# Altium PCB TouchPanel.PcbDoc
Units mil, origin at the board's own origin, x right, y up, seen from the top; angles counter-clockwise.
Board outline 2650 x 2300 mil, 2 copper layers (Top Layer, Bottom Layer); 29 components, 23 nets, 145 pads, 13 vias.
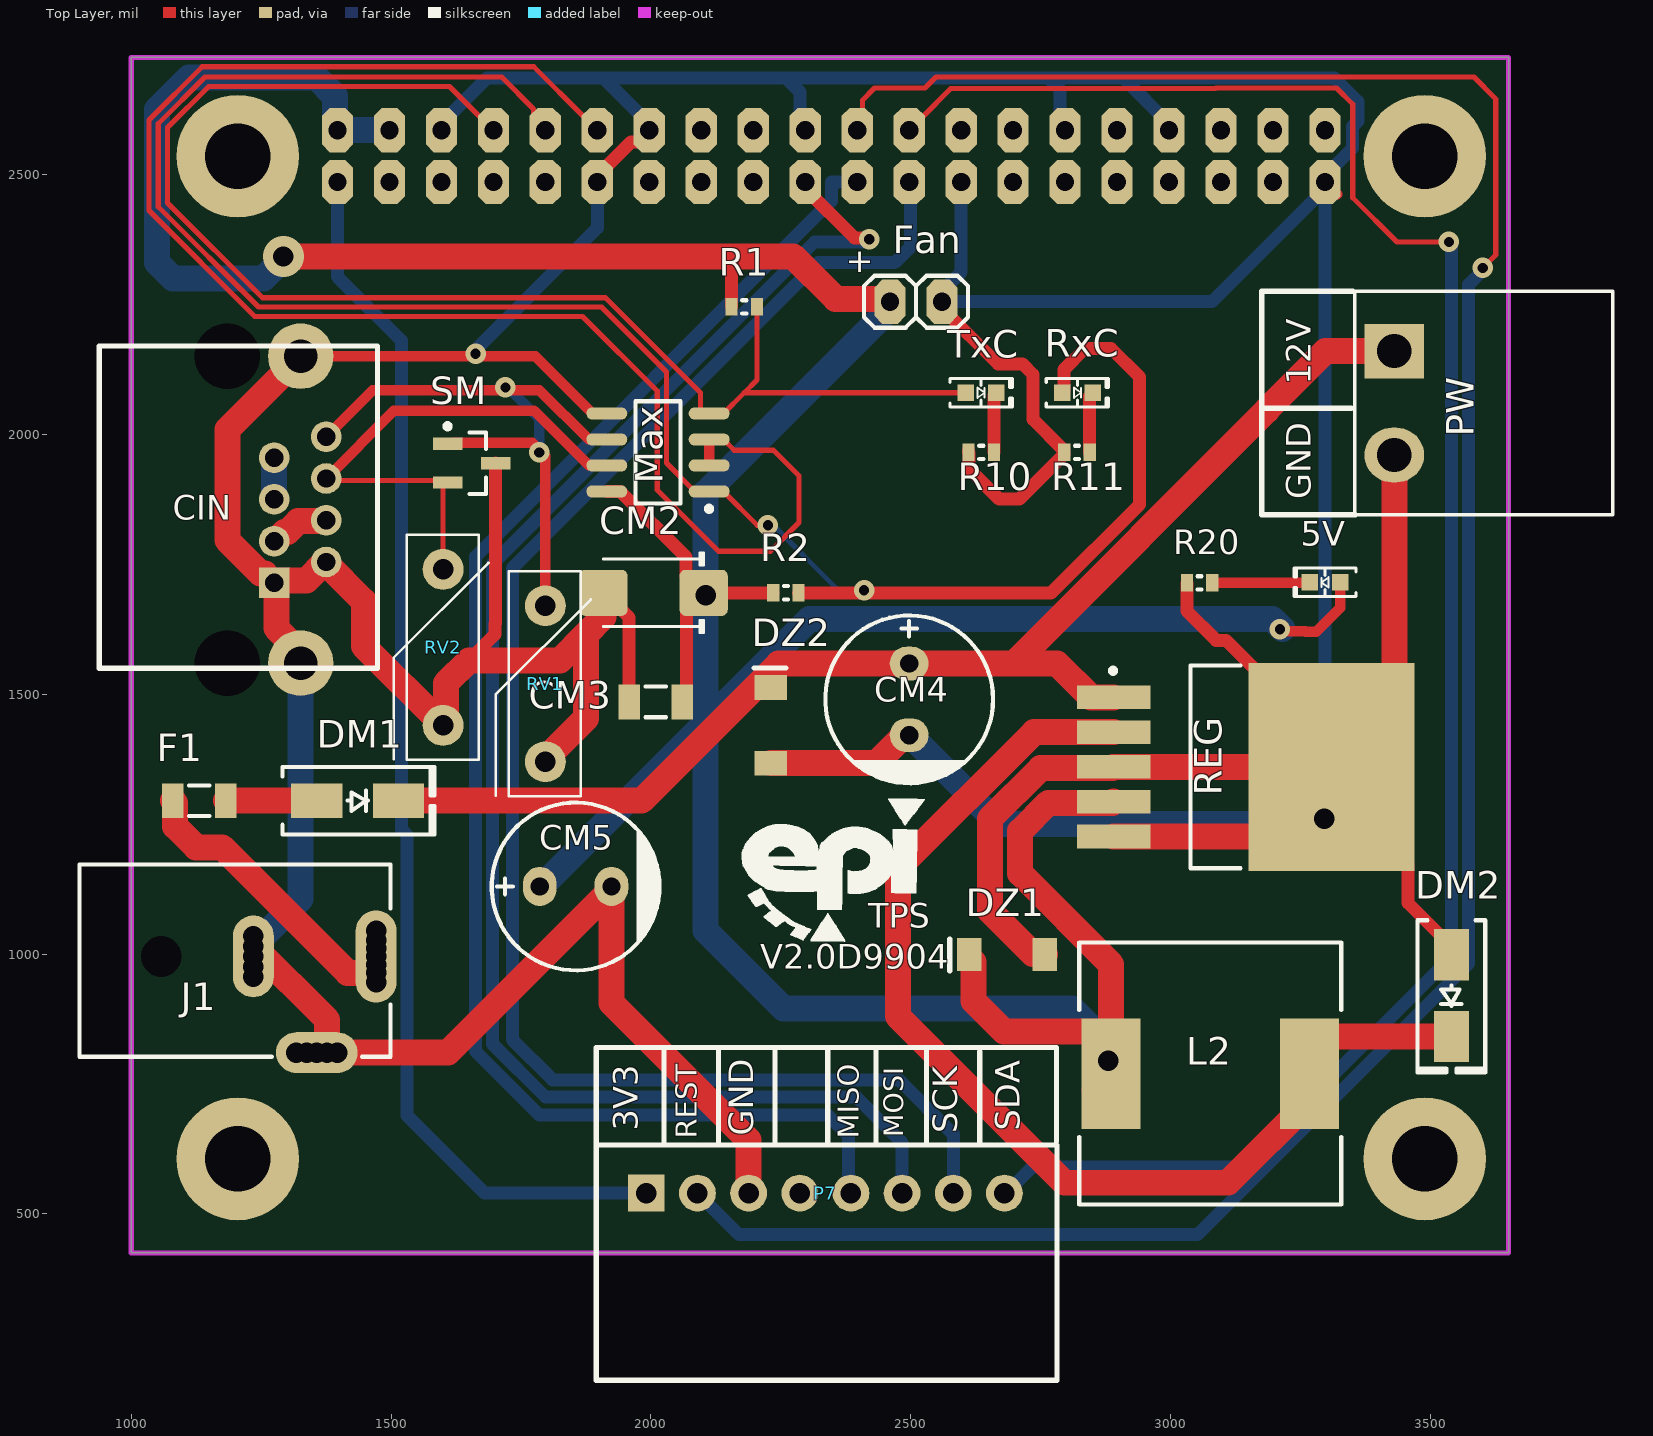
[diagram p0: Top Layer view]
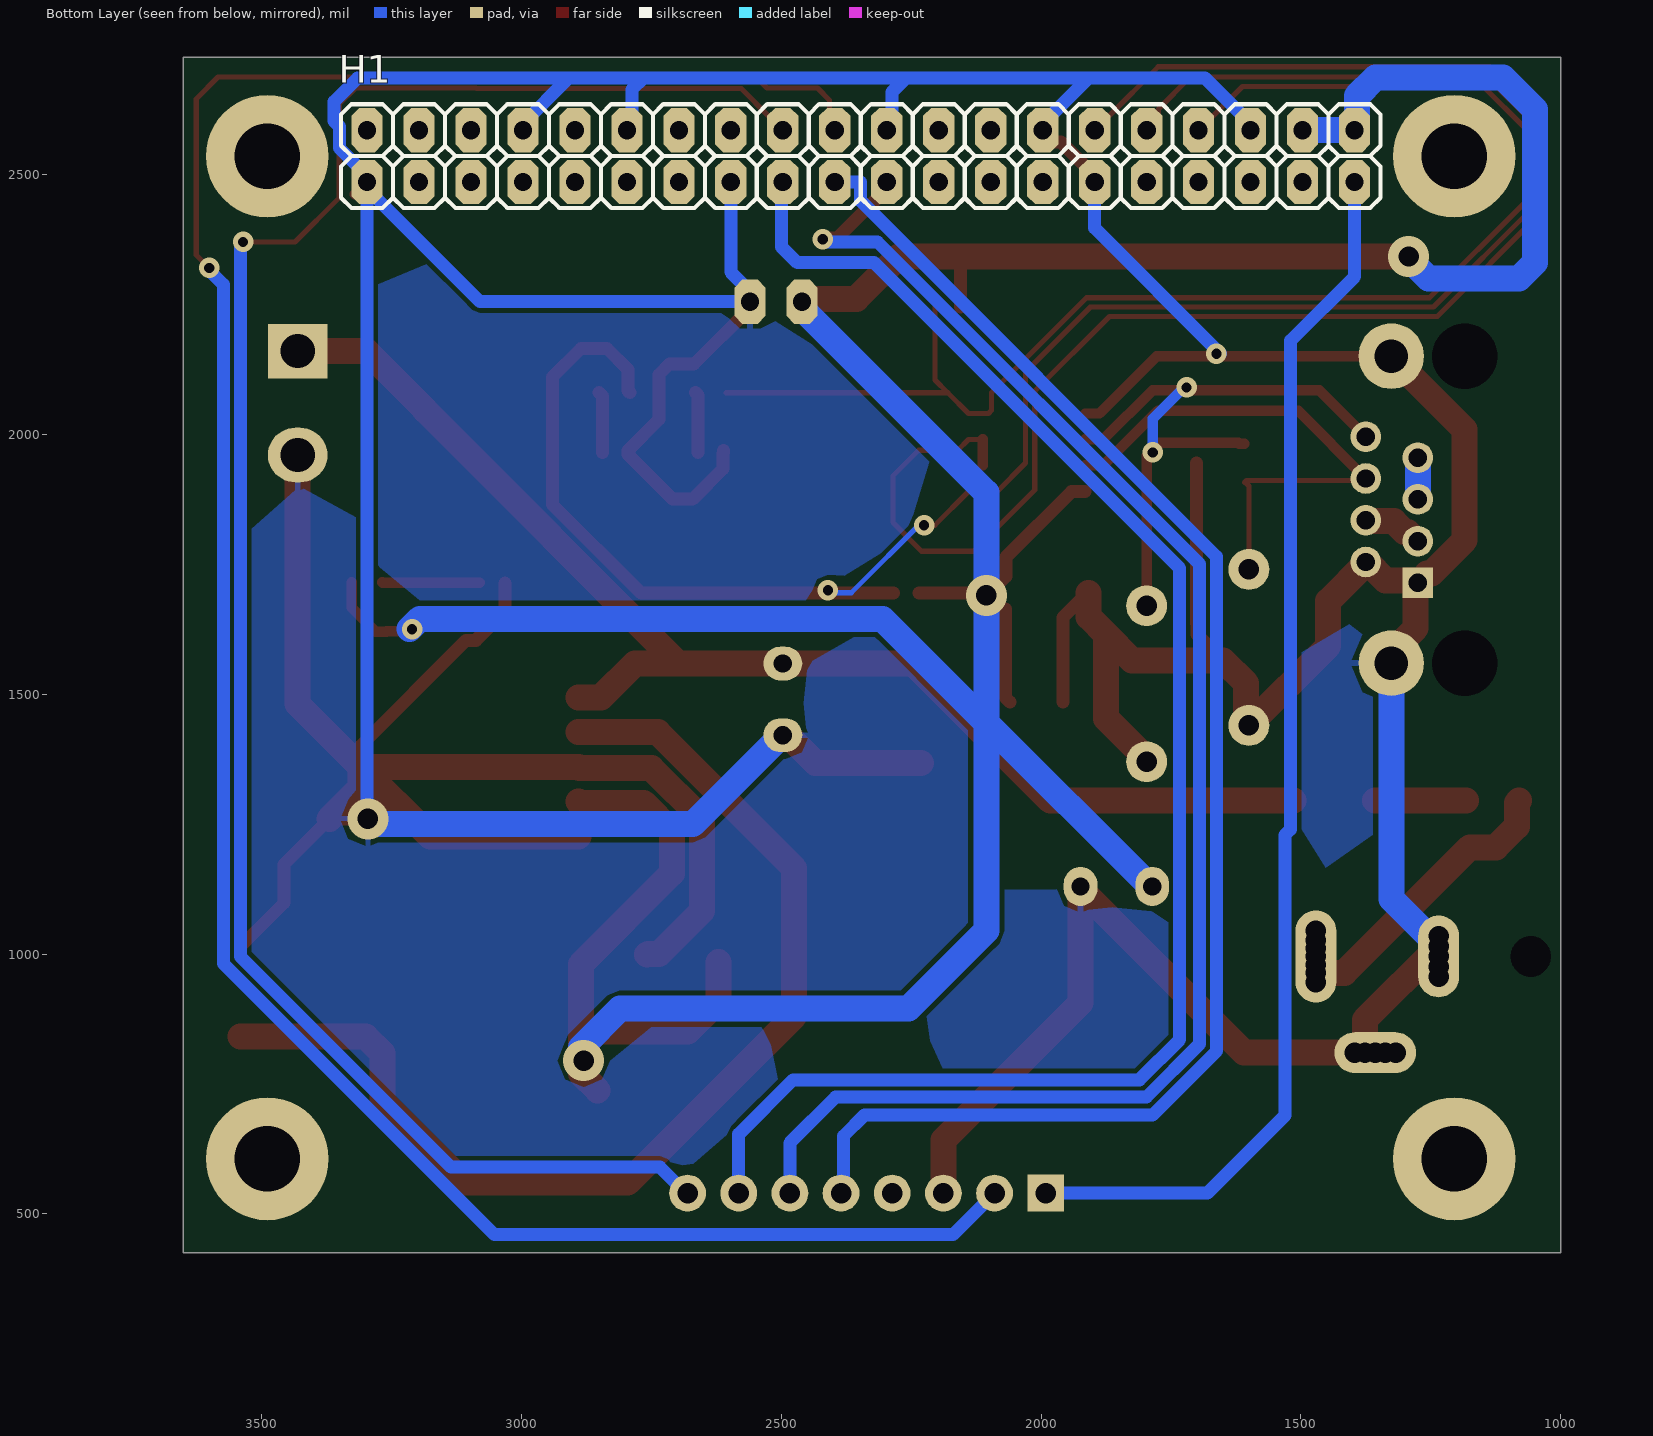
[diagram p1: Bottom Layer view, seen from below]

## Layer stack, top to bottom
Top Solder: solder mask 0.4, Solder Resist, Dk 3.5
Top Layer: signal copper 1.4
Dielectric 1: dielectric 12.6, FR-4, Dk 4.8
Bottom Layer: signal copper 1.4
Bottom Solder: solder mask 0.4, Solder Resist, Dk 3.5

## Board outline
1000,425 1000,2725 3650,2725 3650,425

## Design rules (kind name [scope] priority, off if disabled: settings)
Clearance [All] p1: gap=7.87 ignorepadtopadclearanceinfootprint=FALSE except(0: Arc-Hole Track-Hole SMDPad-Hole THPad-Hole Via-Hole Fill-Hole Poly-Hole Region-Hole Text-Hole)
PolygonConnect [All] p1: connectstyle=Relief reliefconductorwidth=10 reliefentries=4 polygonreliefangle="90 Angle" airgapwidth=10
RoomDefinition TouchPanel [InComponentClass('TouchPanel')] p1: confinementstyle=ConfineOut formatcopy=TRUE lockcomponents=FALSE outline 4480,520 4700,520 4700,2640 4480,2640
RoutingVias [All] p1: holewidth=28 width=50 viastyle="Through Hole" minholewidth=28 minwidth=50 maxholewidth=28 maxwidth=50
SolderMaskExpansion [All] p1: expansion=4
Width [All] p1: maxlimit=100 minlimit=10 preferedwidth=50 minimp=50.000000 maximp=50.000000 favimp=50.000000
30 further rules are at their usual default settings.

## Components (designator, comment, footprint, x,y, rotation, side; value= is the part's Value field where it differs from the comment)
5V "RED" "LED 0603/1608 RED" 3296.73,1715 r180 top
CIN "CN_MODJACK_8P" "CN_RJ45_TYCO_ DY122-8P8C-G" 1184.45,2150.28 r270 top
CM2 "10uF" CAPMP6032X280N 2005,1695 r180 top
CM3 "100nF" SMD_CAP_1206 2060,1485 r180 top
CM4 "100uF" "cap 03" 2496.73,1490 r90 top
CM5 "1000uF" "cap 03" 1855,1130 r180 top
DM1 "1N5822" "DO214AC SMA" 1435.79,1295 r0 top
DM2 "1N5822" "DO214AC SMA" 3540,920 r270 top
DZ1 "DZ5.6V 0.5W" Minimelf 2685,998.74 r180 top
DZ2 "DZ13V 0.5W" Minimelf 2230,1440 r90 top
F1 "Fuse 4A 1206" "Fuse SMD 1206" 1135,1290 r0 top
Fan "Header 2" "Male 2X1" 2460,2255 r0 top
H1 "20*2" "FEMALE 20x2" 1396.73,2585 r0 bottom locked
J1 "Power Jack" "Power Jack" 900.35,995.32 r0 top
L2 "Inductor" "BOURNS SRR1280" 3075.94,770 r180 top value=100uH2A
Max "MAX485ESA" SO8_NARROW_N 2013.43,1965 r180 top
P7 "XH8PF" CN_JST-B8B-S_XH 1991.02,540 r180 top
PW "Header 2" "phonix 2pin right 5.08" 3430,2060 r0 top
R1 "10k" "RES 0603 (1608X06L)" 2203.99,2245 r180 top
R2 "10k" "RES 0603 (1608X06L)" 2283.99,1695 r180 top
R10 "510" "RES 0603 (1608X06L)" 2611.01,1965 r0 top
R11 "510" "RES 0603 (1608X06L)" 2795,1965 r0 top
R20 "1K" "RES 0603 (1608X06L)" 3031.01,1714.06 r0 top
REG "LM2576-5V" TO-263-5 3143.94,1360 r0 top
RV1 "Res Varistor 10D201K" "Varistor Short Hieght - Vertical" 1796.73,1520 r270 top
RV2 "Res Varistor 10D201K" "Varistor Short Hieght - Vertical" 1600,1590 r270 top
RxC "RED" "LED 0603/1608 RED" 2820.47,2080 r0 top
SM "SM712 Diode" SOT23_BEC_M 1655,1944.43 r0 top
TxC "RED" "LED 0603/1608 RED" 2635,2080 r0 top

## Footprints (in the part's own frame and the unit in brackets; to place one, negate y for a bottom-side part, rotate by r counter-clockwise, add the part's x,y. Pads: shape width x height; smd on the part's side, far side on the other; paste and mask are expansions set on the pad)
"BOURNS SRR1280" [mm] "Precision Wire Wound Inductor, 2-Leads, Body 12.50x12.50mm, IPC Medium Density"
  rect 2.9x5.4 smd: 1(-4.85,0) 2(4.85,0)
  silkscreen extent -6.4,-6.4 6.4,6.4, body extent -6.25,-6.25 6.25,6.25, height 7.9
"cap 03" [mil]
  oval 65x75 hole 35: 1(68.9,0) 2(-68.9,0)
  silkscreen extent -161,-161 161,161, body extent -159,-159 157,158, height 473
CAPMP6032X280N [mm] "Capacitor, polarized, Molded Body, EIA 535BAAC size C; 6.00mm L X 3.20mm W X 2.80mm H"
  round 0.508 on Mech15: 0(0,0)
  rrect25% 2.35x2.25 smd: 1(-2.45,0) 2(2.45,0)
  silkscreen extent -2.45,-1.95 2.45,1.95, body extent -3.87,-2.02 3.73,1.93, height 3.1
CN_JST-B8B-S_XH [mm] "JST 2.5mm disconnectable crimp connector"
  rect 1.8x1.8 hole 1: 1(0,0)
  round 1.8 hole 1: 2(-2.5,0) 3(-5,0) 4(-7.5,0) 4(-7.5,0) 5(-10,0) 6(-12.5,0) 7(-15,0) 8(-17.5,0)
  silkscreen extent -20.07,-2.35 2.45,9.14, body extent -20.07,-2.35 2.45,9.2, height 6.1
"CN_RJ45_TYCO_ DY122-8P8C-G" [mm] "DY122-8P8C-G javan"
  rect 1.5x1.5 hole 0.9: 1(11.08,2.3)
  round 1.5 hole 0.9: 2(10.06,4.84) 3(9.04,2.3) 4(8.02,4.84) 5(7,2.3) 6(5.98,4.84) 7(4.96,2.3) 8(3.94,4.84)
  round 3.2 hole 1.63: 9(0,3.6) 9(15,3.6)
  round 0 hole 3.2: " "(0,0) " "(15,0)
  silkscreen extent -0.5,-6.25 15.25,7.35, body extent -1.75,-8.5 16.89,7.25, height 14.6
"DO214AC SMA" [mm]
  rect 2.5x1.7 smd: 1(-2,0) 2(2,0)
  silkscreen extent -3.68,-1.65 3.75,1.65, body extent -2.6,-1.37 2.6,1.37, height 2.4
"FEMALE 20x2" [mil]
  oct 60x85 hole 35: 1(0,0) 2(100,0) 3(200,0) 4(300,0) 5(400,0) 6(500,0) 7(600,0) 8(700,0) 9(800,0) 10(900,0) 11(1000,0) 12(1100,0) 13(1200,0) 14(1300,0) 15(1400,0) 16(1500,0) 17(1600,0) 18(1700,0) 19(1800,0) 20(1900,0) 21(0,100) 22(100,100) 23(200,100) 24(300,100) 25(400,100) 26(500,100) 27(600,100) 28(700,100) 29(800,100) 30(900,100) 31(1000,100) 32(1100,100) 33(1200,100) 34(1300,100) 35(1400,100) 36(1500,100) 37(1600,100) 38(1700,100) 39(1800,100) 40(1900,100)
  silkscreen extent -50,-50 1950,150, body extent -50,-50 1950,150, height 333
"Fuse SMD 1206" [mm]
  rect 1.05x1.7 smd: 1(-1.397,0.127) 2(1.199,0.127)
  silkscreen extent -0.6,-0.62 0.4,0.88, body extent -1.14,-0.51 0.89,0.76, height 0.2
"LED 0603/1608 RED" [mm]
  rect 0.8x0.8 smd: 1(-0.75,0) 2(0.75,0)
  silkscreen extent -1.52,-0.7 1.52,0.7, body extent -0.8,-0.4 0.8,0.4, height 0.53
"Male 2X1" [mil]
  oct 60x85 hole 35: 1(0,0) 2(100,0)
  silkscreen extent -50,-50 150,50, body extent -50,-50 150,50, height 460
Minimelf [mm]
  rect 1.2x1.6 smd: 1(-1.85,-0.013) 2(1.85,-0.013)
  silkscreen extent 2.8,-0.75 2.8,0.8, body extent -1.85,-0.77 1.85,0.8, height 1.6
"phonix 2pin right 5.08" [mil]
  rect 115x105 hole 66: 1(0,100)
  oval 115x105 hole 66: 2(0,-100)
  silkscreen extent -76,-215 420,215, body extent -60,-199 410,208, height 310
"Power Jack" [mm]
  round 1.5 hole 1: 1(14.5,-1.25) 1(14.5,-0.8) 1(14.5,-0.4) 1(14.5,0.4) 1(14.5,0.8) 1(14.5,1.25) 2(8.5,-1) 2(8.5,1) 2(8.5,-0.5) 2(8.5,0.5) 3(10.6,-4.7) 3(11.1,-4.7) 3(12.1,-4.7) 3(12.6,-4.7)
  oval 2x4.5 hole 1: 1(14.5,0)
  oval 2x4 hole 1: 2(8.5,0)
  oval 4x2 hole 1: 3(11.6,-4.7)
  round 1.9 hole 2: MH(4,0)
  silkscreen extent 0,-4.9 15.2,4.5, body extent 0,-4.9 15.2,4.5, height 11
"RES 0603 (1608X06L)" [mm]
  rect 0.6x0.85 smd: 1(0,0) 2(1.244,0)
  silkscreen extent 0.52,-0.33 0.72,0.33, body extent -0.14,-0.38 1.38,0.38, height 0.45
SMD_CAP_1206 [mm]
  rect 1.05x1.7 smd: 1(0,0) 2(2.596,0)
  silkscreen extent 0.8,-0.75 1.8,0.75, body extent -0.22,-0.77 2.82,0.75, height 0.75
SO8_NARROW_N [mm]
  oval 2x0.6 smd: 1(-2.5,1.905) 2(-2.5,0.635) 3(-2.5,-0.635) 4(-2.5,-1.905) 5(2.5,-1.905) 6(2.5,-0.635) 7(2.5,0.635) 8(2.5,1.905)
  silkscreen extent -2.63,-2.5 1.1,2.88, body extent -3.12,-2.39 3.07,2.44, height 1.7
SOT23_BEC_M [mm] "SOT23, 3-Leads, Body 2.9x1.3mm, Pitch 0.95mm, Lead Span 2.4mm, IPC Low Density"
  rect 1.45x0.6 smd: 1(-1.175,0.95) 2(-1.175,-0.95) 3(1.175,0)
  silkscreen extent -1.3,-1.5 0.7,1.92, body extent -1.23,-1.45 1.07,1.45, height 1
TO-263-5 [mm]
  rect 3.6x1.15 smd: 1(-6.45,3.4) 2(-6.45,1.7) 3(-6.45,0) 4(-6.45,-1.7) 5(-6.45,-3.4)
  rect 8.1x10.15 smd paste-5: 6(4.2,0)
  silkscreen extent -6.6,-4.95 -0.25,4.95, body extent -7.31,-5.08 7.33,5.08, height 4.57
"Varistor Short Hieght - Vertical" [mm]
  round 2 hole 1: 1(3.81,0) 2(-3.81,0)
  silkscreen extent -5.5,-2.41 5.5,2.22, body extent -5.5,-1.78 5.5,1.74, height 12

## Part data
5V RxC TxC: library part LED, "Chip LED", Price=845
CM2: library part Cap-Polar, "Polar Capacitor", Voltage=16V, Adding Date=1387/12/20, Designer="Saeid Jorablo", Organazation=ControTec
CM3: library part Cap-Bipolar, "Bipolar Capacitor", Voltage=100V, Adding Date=1387/12/20, Designer="Saeid Jorablo", Organazation=ControTec
CM4: library part Cap-Polar, "Polar Capacitor", Voltage=63V, Adding Date=1387/12/20, Designer="Saeid Jorablo", Organazation=ControTec
CM5: library part Cap-Polar, "Polar Capacitor", Voltage=25V, Adding Date=1387/12/20, Designer="Saeid Jorablo", Organazation=ControTec
DM1 DM2: library part "Diode 1N4148", "High Conductance Fast Diode", Code_JEDEC=DO-204-AH, ComponentLink1Description="Manufacturer Link", ComponentLink1URL=http://www.fairchildsemi.com/, ComponentLink2Description=Datasheet, ComponentLink2URL=http://www.fairchildsemi.com/ds/1N%2F1N4148.pdf, DatasheetVersion=1997, LatestRevisionDate=17-Jul-2002, LatestRevisionNote="Re-released for DXP Platform.", PackageDescription="Diode, Axial; Body 3.8 x 1.9 mm (LxDia. max), Lead Dia. 0.53 mm (max)", PackageReference=DO-35, Published=8-Jun-2000, Publisher="Altium Limited"
DZ1: library part "D Zener", "Zener Diode", Voltage=5.1, Price=1840
DZ2: library part "D Zener", "Zener Diode", Voltage=13, Price=1840
F1: library part "Fuse 2", "Fuse", Current=4A, LatestRevisionDate=17-Jul-2002, LatestRevisionNote="Re-released for DXP Platform.", PackageDescription="Thru-Hole; 2 Leads", PackageReference=PIN-W2/E2.8, Published=8-Jun-2000, Publisher="Altium Limited"
Fan PW: "Header, 2-Pin", LatestRevisionDate=17-Jul-2002, LatestRevisionNote="Re-released for DXP Platform.", Publisher="Altium Limited", system=connector
H1: "20x2 100mil Header"
J1: "Power Jack 12V 4A", Adding Date=10/21/2009, Company=Personal, Designer="Saeid Jorablo", Project Name=Laser
Max: library part MAX485CPA, Price=14700
P7: library part "Header 1x8"
R1 R2 R10 R11 R20: library part Resistor, "Resistor", Power=1/4W
  R1 R2: Price=394
  R10 R11 R20: Price=276
REG: library part LM2596, Price=5700
RV1 RV2: library part "Res Varistor", "Varistor (Voltage-Sensitive Resistor)", Code_IPC=RESC2012, LatestRevisionDate=29-May-2009, LatestRevisionNote="IPC-7351 Footprint Added.", PackageDescription="Chip Resistor 0805 Case Size", PackageReference=6-0805, PackageVersion=Mar-2003, Published=24-Mar-1999, Publisher="Altium Limited"
L2: Code_IEC=1005, Code_JEITA=0402, LatestRevisionDate=29-May-2009, LatestRevisionNote="IPC-7351 Footprint Added.", PackageDescription="Chip Inductor", PackageReference=0402-A, Published=8-Jun-2000, Publisher="Altium Limited"

## Free pads (board coordinates)
  round 236.22 hole 125.98: 0(1205,605.87) 0(1205,2535) 0(3488.46,605.87) 0(3488.46,2535)

## Via types
v1: diameter 39.37, hole 19.68, Top Layer to Bottom Layer, 9 vias
v2: diameter 78.74, hole 39.37, Top Layer to Bottom Layer, 4 vias

## Nets (pads, with @x,y where several pads share a name; then routed paths per layer and width w, separated by ;. In a path a pad name is that pad's centre, name@x,y a point inside that pad or via, vN(x,y) a via of type N, cw(c..) or ccw(c..) an arc to the next point about the centre after c; other vN are vias at no path point)
3.3V: H1.21 P7.1 | length 2385.9
  Top Layer w25: H1.21@1396.73,2472.5 H1.21
  Bottom Layer w25: H1.21 1396.73,2303.27 1520,2180 1520,1240 1530.96,1229.04 1530.96,689.04 1680,540 P7.1
5V: 5V.1 CM2.1 CM3.1 CM5.1 DZ1.2 Fan.1 H1.1 H1.2 L2.2 Max.8 R1.2 R2.2 REG.4 | length 8257.8
  Top Layer w20: v1(3210,1625) 3213.71,1621.29 3258.71,1621.29 3260,1620 3280,1620 3326.26,1666.26 5V.1
  Top Layer w25: Max.8 1941.18,1890 2067.7,1763.48 2067.7,1726.79 CM2.1@2099.49,1695 ; CM3.1 2068.17,1493.17 CM2.1@2068.17,1663.68 ; CM2.1 R2.2 ; R1.2 2155,2340.36 2156.61,2341.97 ; Fan.1 Fan.1@2460,2259.82
  Top Layer w50: v2(1292.76,2341.97) 2156.61,2341.97 2273.39,2341.97 2355,2260.36 2459.47,2260.36 Fan.1@2460,2259.82 ; CM5.1@1786.1,1120.94 CM5.1 ; DZ1.2@2620,985 2620,910 2678.7,851.3 2852.91,851.3 L2.2@2885,819.21 ; L2.2@2852.91,737.91 L2.2 L2.2@2885,819.21 ; REG.4 2887.64,1290.71 2764.4,1290.71 2710,1236.31 2710,1155 2885,980 L2.2@2885,819.21
  Bottom Layer w50: v2@1290,2335 1255,2300 1080,2300 1050,2330 1050,2625 1110.98,2685.98 1356.81,2685.98 1392.09,2650.71 1392.09,2589.64 H1.1 H1.2 ; CM5.1@1788.05,1128.05 2105,1445 ; Fan.1 2460,2242.5 2105,1887.5 v2(2105,1690) 2105,1445 ; v2@2885,820 2810,895 2255,895 2105,1045 2105,1445 ; v1@3215,1625 3195,1645 2305,1645 2105,1445
  other v2: 2880,795
8V_IN: CIN.5 CIN.7 | length 80.3
  Bottom Layer w50: CIN.5 CIN.7
12V: CM4.1 DM1.2 DZ2.2 PW.1 REG.1 | length 2493.6
  Top Layer w50: DM1.2 1981.85,1295 2245.75,1558.9 CM4.1 2698.07,1558.9 ; REG.1 2846.5,1493.86 2781.46,1558.9 2698.07,1558.9 ; PW.1 3297.5,2160 3185,2047.5 3185,2045.83 2698.07,1558.9
24V_IN: CIN.3 CIN.4 | length 116.6
  Top Layer w50: CIN.3 1277.45,1794.37 1295.36,1812.28 1300.85,1812.28 1321.36,1832.8 1373.27,1832.8 CIN.4
485+_Comm: CIN.8 Max.6 RV1.2 SM.1 | length 1261
  Top Layer w20: CIN.8 1464.84,2085 1785,2085 1880,1990 Max.6 ; SM.1 1618.64,1981.83 1620.46,1983.64 1771.36,1983.64 1796.73,1958.27 RV1.2
  Bottom Layer w20: v1@1720,2095 1785,2030 v1(1785,1965)
  other v1: 1720,2090
485-_Comm: CIN.6 Max.7 RV2.2 SM.2 | length 1046.2
  Top Layer w10: CIN.6 1378.91,1910.94 1604.83,1910.94 SM.2 1606.81,1907.03 1600,1900.22 RV2.2
  Top Layer w20: CIN.6 1505.16,2045 1775,2045 1880,1940 Max.7
CS485_Comm: H1.6 Max.2 Max.3 | length 3128.7
  Top Layer w10: H1.6 1896.73,2585.43 1871.73,2610.43 1871.3,2610.43 1774.61,2707.13 1136.57,2707.13 1034.25,2604.81 1034.25,2430.19 1237.69,2226.75 1868.25,2226.75 2011.99,2083.01 2011.99,1893.01 2130,1775 2230,1775 2285,1830 2285,1920 2235.73,1969.27 2160.14,1969.27 2139.41,1990 Max.3
  Top Layer w20: Max.2 Max.3
GND: CIN.1 CIN.2 CIN.9 CM2.2 CM3.2 CM4.2 CM5.2 DM2.1 DZ1.1 DZ2.1 Fan.2 H1.3 H1.7 H1.10 H1.15 H1.17 H1.26 H1.33 H1.40 J1.2 J1.3 Max.5 P7.3 PW.2 R10.1 R11.1 R20.1 REG.3 REG.5 REG.6 RV1.1 RV2.1 SM.3 | length 16011
  Top Layer w20: CIN.9@1326.18,2150.28 1777.17,2150.28 1887.44,2040 Max.5 ; H1.40 3296.73,2481.64 3316.73,2461.64 H1.40@3320.09,2461.64
  Top Layer w25: 1650,1565 1700,1615 1700,1635 1701.26,1636.26 SM.3 ; H1.26 1896.73,2497.5 1961.91,2562.68 1979.23,2562.68 1996.73,2580.18 H1.7 ; CM2.2 1910.51,1695 1957.8,1647.72 CM3.2 ; Fan.2 2560,2242.5 2667.5,2135 2715,2135 2735,2115 2735,2028.54 2795,1968.54 R11.1 2795,1961.46 2708.54,1875 2670,1875 2611.7,1933.3 2611.7,1964.31 R10.1 R10.1@2611.01,1968.54 ; R20.1 3031.01,1659.82 3087.27,1603.56 3106.08,1603.56 3309.29,1400.35 REG.6 ; v2(3295,1260) 3368.94,1260 3456.24,1172.7 3456.24,1098.25 3540,1014.49 DM2.1
  Top Layer w50: J1.2@1235,1015 1376.73,873.27 J1.3@1376.73,810.28 ; J1.3@1317.68,810.28 1337.36,810.28 1357.05,810.28 J1.3@1376.73,810.28 ; CIN.9@1326.18,1559.72 1326.18,1580.29 1279.53,1626.94 1279.53,1709.53 CIN.1 ; CIN.9@1326.18,2150.28 1185,2009.09 1185,1796.12 1249.15,1731.97 1257.09,1731.97 CIN.1 ; RV1.1 1796.73,1375.21 1875,1453.48 1875,1615 ; CM2.2 1908.54,1648.54 1875,1615 ; CM5.2@1926.77,1127.13 CM5.2 CM5.2@1923.9,1125 ; P7.3 2187.87,642.13 1923.9,906.1 CM5.2@1923.9,1125 ; DZ2.1 2433.74,1367.16 2487.67,1421.1 CM4.2 ; DZ1.1 2756.58,1000.49 2734.51,1000.49 2652.13,1082.87 2652.13,1260.28 2749.48,1357.64 2887.64,1357.64 REG.3 REG.6 ; REG.5 3175.43,1226.14 REG.6 ; REG.6@3368.94,1260 3309.29,1319.65 REG.6 ; PW.2 3430,1480.71 REG.6 ; CIN.1 1279.53,1718.58 1336.92,1718.58 1372.55,1754.21 1447.69,1679.08 1447.69,1592.31 RV2.1 1605.5,1445.5 1605.5,1520.5 1650,1565 1825,1565 1875,1615 ; J1.3@1376.73,810.28 1396.42,810.28 1609.17,810.28 CM5.2@1923.9,1125
  Bottom Layer w25: H1.3 1596.73,2597.5 1684.23,2685 1909.23,2685 ; v1@1655,2155 1896.73,2396.73 H1.26 ; H1.7 1996.73,2597.5 1909.23,2685 ; H1.10 2286.91,2594.82 2286.91,2658.09 2260,2685 ; H1.33 2596.73,2311.91 2560,2275.18 Fan.2 3079.23,2255 H1.40@3296.73,2472.5 ; H1.15 2786.91,2594.82 2786.91,2663.09 2765,2685 ; H1.17 2996.73,2597.5 2909.23,2685 ; v2(3295,1260) 3295,1251.06 3296.06,1250 3296.73,1249.33 H1.40@3296.73,2472.5 ; 1909.23,2685 2260,2685 ; 2260,2685 2765,2685 ; 2765,2685 2909.23,2685 ; 2909.23,2685 3315,2685 3360,2640 3360,2602.38 3349.98,2592.36 3349.98,2550.75 3296.73,2497.5 H1.40 H1.40@3296.73,2472.5
  Bottom Layer w50: J1.2@1235,1015 1326.18,1106.18 CIN.9@1326.18,1559.72 ; CM5.2 CM5.2@1926.77,1127.13 ; CM4.2 2498.9,1421.1 2670,1250 v2@3296.06,1250
  other v1: 1662.46,2155
MISO: H1.31 P7.5 | length 2902.2
  Bottom Layer w25: P7.5 2380,544.72 2380,650 2340,690 1785.59,690 1662.46,813.13 1662.46,1764.42 2347.11,2449.06 2347.11,2485 H1.31
MOSI: H1.30 P7.6 | length 3044.7
  Top Layer w25: H1.30 2296.73,2472.5 2391.48,2377.75 2417.25,2377.75 v1(2420,2375)
  Bottom Layer w25: v1@2420,2370 2314.54,2370 1695.33,1750.8 1695.33,826.75 1797.08,725 2395,725 2483.15,636.85 P7.6
Net5V_2: 5V.2 R20.2 | length 187.6
  Top Layer w20: R20.2 3080.47,1714.53 3266.73,1714.53 5V.2
NetDM1_1: DM1.1 F1.2 | length 174.8
  Top Layer w50: F1.2 DM1.1
NetDM2_2: DM2.2 L2.1 REG.2 | length 2176.3
  Top Layer w50: REG.2 2736.93,1426.93 2475,1165 2475,880.47 2795.47,560 3110,560 3266.89,716.89 L2.1 3266.89,809.17 3298.98,841.26 DM2.2
NetF1_1: F1.1 J1.1 | length 554.8
  Top Layer w50: F1.1 1084.33,1290.67 1084.33,1245.67 1125,1205 1175,1205 1416.18,963.82 J1.1@1471.22,963.82
NetR10_2: R10.2 TxC.2 | length 116.9
  Top Layer w25: R10.2 2660,2075.47 TxC.2
NetR11_2: R11.2 RxC.2 | length 117.5
  Top Layer w25: R11.2 2843.99,2073.99 RxC.2
RES_IDCART: H1.11 P7.2 | length 4736.1
  Top Layer w10: H1.11 2406.73,2595 2406.73,2642.72 2430,2665.98 2526.93,2665.98 2548.07,2687.13 3583.15,2687.13 3625.14,2645.14 3625.14,2345.14 v1(3600,2320)
  Bottom Layer w25: P7.2 2169.45,460 3051.49,460 3572.87,981.38 3572.87,2287.87 v1@3605,2320
RxComm: H1.5 Max.1 R2.1 RxC.1 | length 3979.4
  Top Layer w10: H1.5 1774.23,2607.5 1774.23,2625.77 1712.87,2687.13 1141.85,2687.13 1052.13,2597.4 1052.13,2437.6 1245.1,2244.63 1905.1,2244.63 2029.86,2119.86 2029.86,1944.43 2084.29,1890 Max.1 2139.41,1890 2204.41,1825 v1(2225,1825)
  Top Layer w25: R2.1 2770,1695 2940,1865 2940,2110 2885,2165 2835,2165 2794.19,2124.19 2794.19,2083.25 RxC.1
  Bottom Layer w10: v1@2225,1835 2365,1695 v1@2420,1695
  other v1: 2410,1700
SCL: H1.23
SCLK: H1.32 P7.7 | length 3091.4
  Bottom Layer w25: H1.32 2498.9,2482.83 2498.9,2360 2468.9,2330 2321.03,2330 1733.23,1742.2 1733.23,835.35 1810.7,757.87 2477.13,757.87 2581.57,653.43 P7.7
SDA: H1.12 P7.8 | length 3723.6
  Top Layer w10: H1.12 2496.73,2585.43 2521.73,2610.43 2522.16,2610.43 2576.73,2665 3085.87,2665 3086.85,2665.98 3319.02,2665.98 3350,2635 3350,2455 3435,2370 v1(3535,2370)
  Bottom Layer w25: P7.8 2683.14,540 2733.14,590 3135,590 3540,995 v1@3540,2370
TxComm: H1.4 Max.4 R1.1 TxC.1 | length 2754.4
  Top Layer w10: H1.4 1696.73,2585.43 1671.73,2610.43 1671.3,2610.43 1612.48,2669.25 1149.25,2669.25 1070,2590 1070,2445 1252.5,2262.5 1912.5,2262.5 2095,2080 2095,2046.29 2101.29,2040 Max.4 2139.41,2040 2179.41,2080 ; R1.1 2203.99,2104.58 2179.41,2080 ; TxC.1 2179.41,2080
pads on no net: "CIN. " CM2.0 H1.8 H1.9 H1.13 H1.14 H1.16 H1.18 H1.19 H1.20 H1.22 H1.24 H1.25 H1.27 H1.28 H1.29 H1.34 H1.35 H1.36 H1.37 H1.38 H1.39 J1.MH P7.4
copper on no net: | length 50
  Top Layer w25: 2696.73,2472.5 2696.73,2485 ; 2796.73,2472.5 2796.73,2485 ; 3096.73,2472.5 3096.73,2485 ; 3196.73,2472.5 3196.73,2485

## Polygon pours and split planes (outlines as drawn)
GND on Bottom Layer "Bottom Layer-GND" (solid, remove dead copper, pour order 0): 1000,2725 3650,2725 3650,425 1000,425

## Keep-outs
Top Layer:
  the board outline again, w10

## Silkscreen, mask and mechanical layers (free items; w line width, h text height)
Top Overlay:
  drawing of 653 lines, arcs and shapes, not listed
  text "+" at 2375,2296 h80
  text "12V" at 3285,2095 h80 r90
  text "GND" at 3285,1875 h80 r90
  text "TPS" at 2417.87,1035 h80
  text "V2.0D9904" at 2210,955.94 h80
  text "3V3" at 1990,660 h80 r90
  text "SDA" at 2725,660 h80 r90
  text "SCK" at 2605,655 h80 r90
  text "GND" at 2212,650 h80 r90
  text "MOSI" at 2498,647.95 h65 r90
  text "REST" at 2101.46,645 h70 r90
  text "MISO" at 2413,645 h70 r90